# EAGLE board HM11 Breakout-Panel (EAGLE 9.6.2)
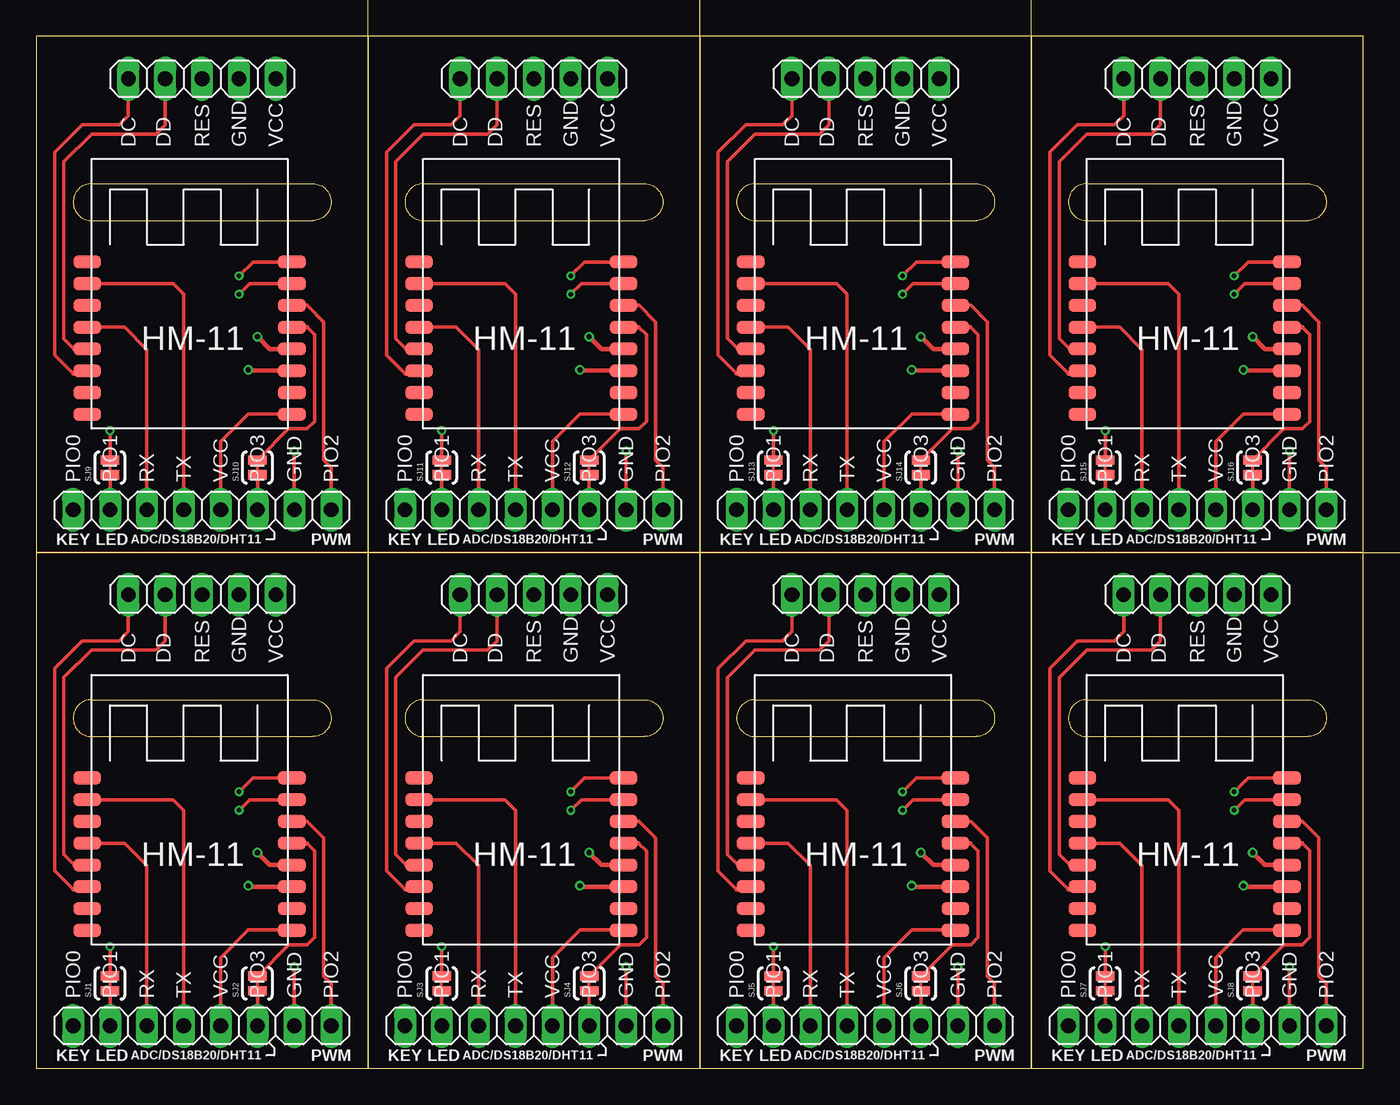
[diagram p0: board, top side]
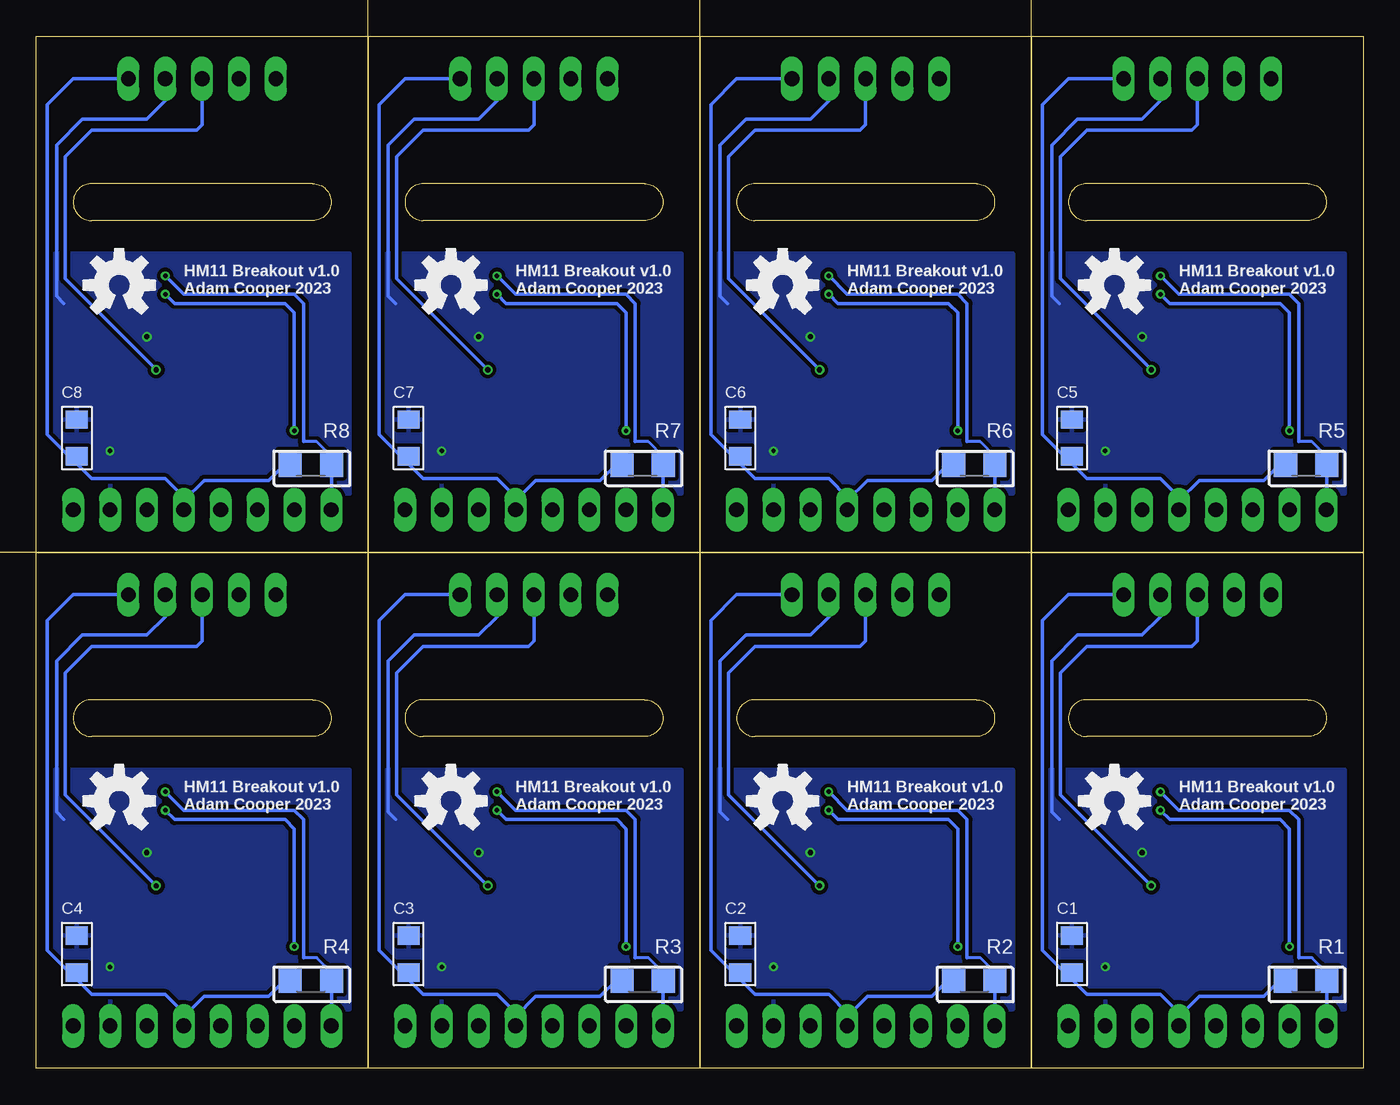
[diagram p1: board, bottom side, seen from below]

Size 91.44 x 71.12 mm. Coordinates in mm from the lower left corner, seen from the top.
Outline: 22.86,0 0,0 0,35.56
Outline: 22.86,0 22.86,35.56
Outline: 22.86,35.56 0,35.56
Outline: 22.86,0 45.72,0
Outline: 45.72,0 45.72,35.56
Outline: 45.72,35.56 22.86,35.56
Outline: 22.86,35.56 22.86,0
Outline: 45.72,0 68.58,0
Outline: 68.58,0 68.58,35.56
Outline: 68.58,35.56 45.72,35.56
Outline: 45.72,35.56 45.72,0
Outline: 68.58,0 91.44,0 91.44,35.56
Outline: 91.44,35.56 68.58,35.56
Outline: 68.58,35.56 68.58,0
Outline: 0,35.56 22.86,35.56
Outline: 22.86,35.56 22.86,71.12
Outline: 22.86,71.12 0,71.12 0,35.56
Outline: 22.86,35.56 45.72,35.56
Outline: 45.72,35.56 45.72,71.12
Outline: 45.72,71.12 22.86,71.12
Outline: 22.86,71.12 22.86,35.56
Outline: 45.72,35.56 68.58,35.56
Outline: 68.58,35.56 68.58,71.12
Outline: 68.58,71.12 45.72,71.12
Outline: 45.72,71.12 45.72,35.56
Outline: 68.58,35.56 91.44,35.56
Outline: 91.44,35.56 91.44,71.12 68.58,71.12
Outline: 68.58,71.12 68.58,35.56
Copper layers (1*16): Top 0.035mm / dielectric 1.5mm / Bottom 0.035mm
Design rules "Seeed Fusion_eagle_rule_v1.1": minimum track width 6mil, minimum drill 12mil, track to track 6mil, track to pad 6mil, pad to pad 6mil, via to via 6mil, smd to smd 0mil, copper to edge 10mil, drill to drill 10mil, minimum pad ring 10mil, minimum via ring 6mil, stop-mask expansion 2mil, vias tented up to drill 100mil, thermal gap 10mil
Milling: 36 lines

## Footprints (pad centres in the part's own frame; a part is rotated, then mirrored left to right if it is on the bottom)
1206 = smd 1.27 x 1.524: 1 -1.27,0; 2 1.27,0
1X05 = drill 1.016 long: 1 -5.08,0; 2 -2.54,0; 3 0,0; 4 2.54,0; 5 5.08,0
1X08 = drill 1.016 long: 1 -8.89,0; 2 -6.35,0; 3 -3.81,0; 4 -1.27,0; 5 1.27,0; 6 3.81,0; 7 6.35,0; 8 8.89,0
R1206 = smd 1.6 x 1.803: 1 -1.422,0; 2 1.422,0
SJ_2S-TRACE = smd 0.635 x 1.27: 1 -0.508,0; 2 0.508,0
HM-11 = smd 1.9 x 0.9: 1 -0.3,11.5; 2 -0.3,10; 3 -0.3,8.5; 4 -0.3,7; 5 -0.3,5.5; 6 -0.3,4; 7 -0.3,2.5; 8 -0.3,1; 9 13.8,1; 10 13.8,2.5; 11 13.8,4; 12 13.8,5.5; 13 13.8,7; 14 13.8,8.5; 15 13.8,10; 16 13.8,11.5

## Placement (x,y rotation side)
C1  100n  [1206]  20.07,7.87 270 bottom
C2  100n  [1206]  42.93,7.87 270 bottom
C3  100n  [1206]  65.79,7.87 270 bottom
C4  100n  [1206]  88.65,7.87 270 bottom
C5  100n  [1206]  20.07,43.43 270 bottom
C6  100n  [1206]  42.93,43.43 270 bottom
C7  100n  [1206]  65.79,43.43 270 bottom
C8  100n  [1206]  88.65,43.43 270 bottom
JP1  [1X05]  11.43,32.64 0 top
JP2  [1X08]  11.43,2.92 180 top
JP3  [1X05]  34.29,32.64 0 top
JP4  [1X08]  34.29,2.92 180 top
JP5  [1X05]  57.15,32.64 0 top
JP6  [1X08]  57.15,2.92 180 top
JP7  [1X05]  80.01,32.64 0 top
JP8  [1X08]  80.01,2.92 180 top
JP9  [1X05]  11.43,68.2 0 top
JP10  [1X08]  11.43,38.48 180 top
JP11  [1X05]  34.29,68.2 0 top
JP12  [1X08]  34.29,38.48 180 top
JP13  [1X05]  57.15,68.2 0 top
JP14  [1X08]  57.15,38.48 180 top
JP15  [1X05]  80.01,68.2 0 top
JP16  [1X08]  80.01,38.48 180 top
LOGO1  OSHW-LOGOM  [OSHW-LOGO-M]  17.14,18.41 0 bottom
LOGO2  OSHW-LOGOM  [OSHW-LOGO-M]  40.01,18.41 0 bottom
LOGO3  OSHW-LOGOM  [OSHW-LOGO-M]  62.87,18.41 0 bottom
LOGO4  OSHW-LOGOM  [OSHW-LOGO-M]  85.72,18.41 0 bottom
LOGO5  OSHW-LOGOM  [OSHW-LOGO-M]  17.14,53.98 0 bottom
LOGO6  OSHW-LOGOM  [OSHW-LOGO-M]  40.01,53.98 0 bottom
LOGO7  OSHW-LOGOM  [OSHW-LOGO-M]  62.87,53.98 0 bottom
LOGO8  OSHW-LOGOM  [OSHW-LOGO-M]  85.72,53.98 0 bottom
R1  1k  [R1206]  3.94,6.1 180 bottom
R2  1k  [R1206]  26.8,6.1 180 bottom
R3  1k  [R1206]  49.66,6.1 180 bottom
R4  1k  [R1206]  72.52,6.1 180 bottom
R5  1k  [R1206]  3.94,41.66 180 bottom
R6  1k  [R1206]  26.8,41.66 180 bottom
R7  1k  [R1206]  49.66,41.66 180 bottom
R8  1k  [R1206]  72.52,41.66 180 bottom
SJ1  SOLDERJUMPERTRACE  [SJ_2S-TRACE]  5.08,5.84 90 top
SJ2  SOLDERJUMPERTRACE  [SJ_2S-TRACE]  15.24,5.84 90 top
SJ3  SOLDERJUMPERTRACE  [SJ_2S-TRACE]  27.94,5.84 90 top
SJ4  SOLDERJUMPERTRACE  [SJ_2S-TRACE]  38.1,5.84 90 top
SJ5  SOLDERJUMPERTRACE  [SJ_2S-TRACE]  50.8,5.84 90 top
SJ6  SOLDERJUMPERTRACE  [SJ_2S-TRACE]  60.96,5.84 90 top
SJ7  SOLDERJUMPERTRACE  [SJ_2S-TRACE]  73.66,5.84 90 top
SJ8  SOLDERJUMPERTRACE  [SJ_2S-TRACE]  83.82,5.84 90 top
SJ9  SOLDERJUMPERTRACE  [SJ_2S-TRACE]  5.08,41.4 90 top
SJ10  SOLDERJUMPERTRACE  [SJ_2S-TRACE]  15.24,41.4 90 top
SJ11  SOLDERJUMPERTRACE  [SJ_2S-TRACE]  27.94,41.4 90 top
SJ12  SOLDERJUMPERTRACE  [SJ_2S-TRACE]  38.1,41.4 90 top
SJ13  SOLDERJUMPERTRACE  [SJ_2S-TRACE]  50.8,41.4 90 top
SJ14  SOLDERJUMPERTRACE  [SJ_2S-TRACE]  60.96,41.4 90 top
SJ15  SOLDERJUMPERTRACE  [SJ_2S-TRACE]  73.66,41.4 90 top
SJ16  SOLDERJUMPERTRACE  [SJ_2S-TRACE]  83.82,41.4 90 top
U$1  HM-11  [HM-11]  3.81,8.51 0 top
U$2  HM-11  [HM-11]  26.67,8.51 0 top
U$3  HM-11  [HM-11]  49.53,8.51 0 top
U$4  HM-11  [HM-11]  72.39,8.51 0 top
U$5  HM-11  [HM-11]  3.81,44.07 0 top
U$6  HM-11  [HM-11]  26.67,44.07 0 top
U$7  HM-11  [HM-11]  49.53,44.07 0 top
U$8  HM-11  [HM-11]  72.39,44.07 0 top

## Library data of the parts
C1-C8 LOGO1-LOGO8 SJ1-SJ16 = Master 2016
JP1-JP16 = pinhead
R1-R8 = rcl; SPICEPREFIX: R
U$1-U$8 = SMD Stamp Modules

## Nets
DC: JP1.1 U$1.6
DC1: JP3.1 U$2.6
DC2: JP5.1 U$3.6
DC3: JP7.1 U$4.6
DC4: JP9.1 U$5.6
DC5: JP11.1 U$6.6
DC6: JP13.1 U$7.6
DC7: JP15.1 U$8.6
DD: JP1.2 U$1.5
DD1: JP3.2 U$2.5
DD2: JP5.2 U$3.5
DD3: JP7.2 U$4.5
DD4: JP9.2 U$5.5
DD5: JP11.2 U$6.5
DD6: JP13.2 U$7.5
DD7: JP15.2 U$8.5
GND: C1.1 JP1.4 JP2.2 U$1.12
GND1: C2.1 JP3.4 JP4.2 U$2.12
GND2: C3.1 JP5.4 JP6.2 U$3.12
GND3: C4.1 JP7.4 JP8.2 U$4.12
GND4: C5.1 JP9.4 JP10.2 U$5.12
GND5: C6.1 JP11.4 JP12.2 U$6.12
GND6: C7.1 JP13.4 JP14.2 U$7.12
GND7: C8.1 JP15.4 JP16.2 U$8.12
N$1: JP2.7 SJ1.1
N$2: JP4.7 SJ3.1
N$3: JP4.3 SJ4.1
N$4: JP6.7 SJ5.1
N$5: JP6.3 SJ6.1
N$6: JP2.3 SJ2.1
N$7: JP8.7 SJ7.1
N$8: JP8.3 SJ8.1
N$9: JP10.7 SJ9.1
N$10: JP10.3 SJ10.1
N$11: JP12.7 SJ11.1
N$12: JP12.3 SJ12.1
N$13: JP14.7 SJ13.1
N$14: JP14.3 SJ14.1
N$15: JP16.7 SJ15.1
N$16: JP16.3 SJ16.1
P0_1: JP4.8 R2.1 U$2.16
P0_2: SJ3.2 U$2.15
P0_3: JP6.8 R3.1 U$3.16
P0_4: SJ5.2 U$3.15
P0_5: JP8.8 R4.1 U$4.16
P0_6: JP2.8 R1.1 U$1.16
P0_7: SJ1.2 U$1.15
P0_8: SJ7.2 U$4.15
P0_9: JP10.8 R5.1 U$5.16
P0_10: SJ9.2 U$5.15
P0_11: JP12.8 R6.1 U$6.16
P0_12: SJ11.2 U$6.15
P0_13: JP14.8 R7.1 U$7.16
P0_14: SJ13.2 U$7.15
P0_15: JP16.8 R8.1 U$8.16
P0_16: SJ15.2 U$8.15
P1_0: JP2.1 U$1.14
P1_1: SJ2.2 U$1.13
P1_2: JP4.1 U$2.14
P1_3: SJ4.2 U$2.13
P1_4: JP6.1 U$3.14
P1_5: SJ6.2 U$3.13
P1_6: JP8.1 U$4.14
P1_7: SJ8.2 U$4.13
P1_8: JP10.1 U$5.14
P1_9: SJ10.2 U$5.13
P1_10: JP12.1 U$6.14
P1_11: SJ12.2 U$6.13
P1_12: JP14.1 U$7.14
P1_13: SJ14.2 U$7.13
P1_14: JP16.1 U$8.14
P1_15: SJ16.2 U$8.13
RST: JP1.3 U$1.11
RST1: JP3.3 U$2.11
RST2: JP5.3 U$3.11
RST3: JP7.3 U$4.11
RST4: JP9.3 U$5.11
RST5: JP11.3 U$6.11
RST6: JP13.3 U$7.11
RST7: JP15.3 U$8.11
RX: JP2.6 U$1.4
RX1: JP4.6 U$2.4
RX2: JP6.6 U$3.4
RX3: JP8.6 U$4.4
RX4: JP10.6 U$5.4
RX5: JP12.6 U$6.4
RX6: JP14.6 U$7.4
RX7: JP16.6 U$8.4
TX: JP2.5 U$1.2
TX1: JP4.5 U$2.2
TX2: JP6.5 U$3.2
TX3: JP8.5 U$4.2
TX4: JP10.5 U$5.2
TX5: JP12.5 U$6.2
TX6: JP14.5 U$7.2
TX7: JP16.5 U$8.2
VCC: C1.2 JP1.5 JP2.4 R1.2 U$1.9
VCC1: C2.2 JP3.5 JP4.4 R2.2 U$2.9
VCC2: C3.2 JP5.5 JP6.4 R3.2 U$3.9
VCC3: C4.2 JP7.5 JP8.4 R4.2 U$4.9
VCC4: C5.2 JP9.5 JP10.4 R5.2 U$5.9
VCC5: C6.2 JP11.5 JP12.4 R6.2 U$6.9
VCC6: C7.2 JP13.5 JP14.4 R7.2 U$7.9
VCC7: C8.2 JP15.5 JP16.4 R8.2 U$8.9

## Tracks (layer width: path | path; a pad name or v marks a point on that pad's centre or on a via)
DC
  Top 0.254: JP1.1 6.35,30.1 5.71,29.46 3.17,29.46 1.27,27.56 1.27,13.59 2.54,12.32
  Top 0.305: 2.54,12.32 3.32,12.32 U$1.6
DC1
  Top 0.254: JP3.1 29.21,30.1 28.57,29.46 26.04,29.46 24.13,27.56 24.13,13.59 25.4,12.32
  Top 0.305: 25.4,12.32 26.18,12.32 U$2.6
DC2
  Top 0.254: JP5.1 52.07,30.1 51.44,29.46 48.9,29.46 46.99,27.56 46.99,13.59 48.26,12.32
  Top 0.305: 48.26,12.32 49.04,12.32 U$3.6
DC3
  Top 0.254: JP7.1 74.93,30.1 74.3,29.46 71.75,29.46 69.85,27.56 69.85,13.59 71.12,12.32
  Top 0.305: 71.12,12.32 71.9,12.32 U$4.6
DC4
  Top 0.254: JP9.1 6.35,65.66 5.71,65.02 3.17,65.02 1.27,63.12 1.27,49.15 2.54,47.88
  Top 0.305: 2.54,47.88 3.32,47.88 U$5.6
DC5
  Top 0.254: JP11.1 29.21,65.66 28.57,65.02 26.04,65.02 24.13,63.12 24.13,49.15 25.4,47.88
  Top 0.305: 25.4,47.88 26.18,47.88 U$6.6
DC6
  Top 0.254: JP13.1 52.07,65.66 51.44,65.02 48.9,65.02 46.99,63.12 46.99,49.15 48.26,47.88
  Top 0.305: 48.26,47.88 49.04,47.88 U$7.6
DC7
  Top 0.254: JP15.1 74.93,65.66 74.3,65.02 71.75,65.02 69.85,63.12 69.85,49.15 71.12,47.88
  Top 0.305: 71.12,47.88 71.9,47.88 U$8.6
DD
  Top 0.254: 2.63,14.01 1.91,14.73 1.91,26.92 3.81,28.83 8.26,28.83 8.89,29.46 JP1.2
  Top 0.305: U$1.5 2.63,14.01
DD1
  Top 0.254: 25.49,14.01 24.77,14.73 24.77,26.92 26.67,28.83 31.11,28.83 31.75,29.46 JP3.2
  Top 0.305: U$2.5 25.49,14.01
DD2
  Top 0.254: 48.35,14.01 47.62,14.73 47.62,26.92 49.53,28.83 53.98,28.83 54.61,29.46 JP5.2
  Top 0.305: U$3.5 48.35,14.01
DD3
  Top 0.254: 71.21,14.01 70.48,14.73 70.48,26.92 72.39,28.83 76.83,28.83 77.47,29.46 JP7.2
  Top 0.305: U$4.5 71.21,14.01
DD4
  Top 0.254: 2.63,49.57 1.91,50.29 1.91,62.48 3.81,64.39 8.26,64.39 8.89,65.02 JP9.2
  Top 0.305: U$5.5 2.63,49.57
DD5
  Top 0.254: 25.49,49.57 24.77,50.29 24.77,62.48 26.67,64.39 31.11,64.39 31.75,65.02 JP11.2
  Top 0.305: U$6.5 25.49,49.57
DD6
  Top 0.254: 48.35,49.57 47.62,50.29 47.62,62.48 49.53,64.39 53.98,64.39 54.61,65.02 JP13.2
  Top 0.305: U$7.5 48.35,49.57
DD7
  Top 0.254: 71.21,49.57 70.48,50.29 70.48,62.48 72.39,64.39 76.83,64.39 77.47,65.02 JP15.2
  Top 0.305: U$8.5 71.21,49.57
GND  (via drill 0.3 pad 0.61, 0.35 pad 0.61)
  Top 0.254: JP2.2 v17.78,6.99
  Top 0.305: U$1.12 16.09,14.01 v15.24,14.86
  Bottom 0.254: JP1.4 13.97,31.11 15.24,29.84 19.68,29.84 21.46,28.07 21.46,17.65 20.95,17.14
  pour Bottom (isolate 0.254): 1.27,4.06 1.27,20.57 21.59,20.57 21.59,4.06
GND1  (via drill 0.3 pad 0.61, 0.35 pad 0.61)
  Top 0.254: JP4.2 v40.64,6.99
  Top 0.305: U$2.12 38.95,14.01 v38.1,14.86
  Bottom 0.254: JP3.4 36.83,31.11 38.1,29.84 42.55,29.84 44.32,28.07 44.32,17.65 43.81,17.14
  pour Bottom (isolate 0.254): 24.13,4.06 24.13,20.57 44.45,20.57 44.45,4.06
GND2  (via drill 0.3 pad 0.61, 0.35 pad 0.61)
  Top 0.254: JP6.2 v63.5,6.99
  Top 0.305: U$3.12 61.81,14.01 v60.96,14.86
  Bottom 0.254: JP5.4 59.69,31.11 60.96,29.84 65.41,29.84 67.18,28.07 67.18,17.65 66.67,17.14
  pour Bottom (isolate 0.254): 46.99,4.06 46.99,20.57 67.31,20.57 67.31,4.06
GND3  (via drill 0.3 pad 0.61, 0.35 pad 0.61)
  Top 0.254: JP8.2 v86.36,6.99
  Top 0.305: U$4.12 84.67,14.01 v83.82,14.86
  Bottom 0.254: JP7.4 82.55,31.11 83.82,29.84 88.27,29.84 90.04,28.07 90.04,17.65 89.53,17.14
  pour Bottom (isolate 0.254): 69.85,4.06 69.85,20.57 90.17,20.57 90.17,4.06
GND4  (via drill 0.3 pad 0.61, 0.35 pad 0.61)
  Top 0.254: JP10.2 v17.78,42.55
  Top 0.305: U$5.12 16.09,49.57 v15.24,50.42
  Bottom 0.254: JP9.4 13.97,66.67 15.24,65.41 19.68,65.41 21.46,63.63 21.46,53.21 20.95,52.7
  pour Bottom (isolate 0.254): 1.27,39.62 1.27,56.13 21.59,56.13 21.59,39.62
GND5  (via drill 0.3 pad 0.61, 0.35 pad 0.61)
  Top 0.254: JP12.2 v40.64,42.55
  Top 0.305: U$6.12 38.95,49.57 v38.1,50.42
  Bottom 0.254: JP11.4 36.83,66.67 38.1,65.41 42.55,65.41 44.32,63.63 44.32,53.21 43.81,52.7
  pour Bottom (isolate 0.254): 24.13,39.62 24.13,56.13 44.45,56.13 44.45,39.62
GND6  (via drill 0.3 pad 0.61, 0.35 pad 0.61)
  Top 0.254: JP14.2 v63.5,42.55
  Top 0.305: U$7.12 61.81,49.57 v60.96,50.42
  Bottom 0.254: JP13.4 59.69,66.67 60.96,65.41 65.41,65.41 67.18,63.63 67.18,53.21 66.67,52.7
  pour Bottom (isolate 0.254): 46.99,39.62 46.99,56.13 67.31,56.13 67.31,39.62
GND7  (via drill 0.3 pad 0.61, 0.35 pad 0.61)
  Top 0.254: JP16.2 v86.36,42.55
  Top 0.305: U$8.12 84.67,49.57 v83.82,50.42
  Bottom 0.254: JP15.4 82.55,66.67 83.82,65.41 88.27,65.41 90.04,63.63 90.04,53.21 89.53,52.7
  pour Bottom (isolate 0.254): 69.85,39.62 69.85,56.13 90.17,56.13 90.17,39.62
N$1
  Top 0.254: SJ1.1 JP2.7
N$2
  Top 0.254: SJ3.1 JP4.7
N$3
  Top 0.254: SJ4.1 JP4.3
N$4
  Top 0.254: SJ5.1 JP6.7
N$5
  Top 0.254: SJ6.1 JP6.3
N$6
  Top 0.254: SJ2.1 JP2.3
N$7
  Top 0.254: SJ7.1 JP8.7
N$8
  Top 0.254: SJ8.1 JP8.3
N$9
  Top 0.254: SJ9.1 JP10.7
N$10
  Top 0.254: SJ10.1 JP10.3
N$11
  Top 0.254: SJ11.1 JP12.7
N$12
  Top 0.254: SJ12.1 JP12.3
N$13
  Top 0.254: SJ13.1 JP14.7
N$14
  Top 0.254: SJ14.1 JP14.3
N$15
  Top 0.254: SJ15.1 JP16.7
N$16
  Top 0.254: SJ16.1 JP16.3
P0_1  (via drill 0.3 pad 0.61)
  Top 0.254: U$2.16 37.79,20.01 v36.83,19.05
  Bottom 0.203: JP4.8 25.38,2.95 | R2.1 25.38,6.6 26.39,7.62 27.3,7.62
  Bottom 0.254: v36.83,19.05 35.56,17.78 27.94,17.78 27.3,17.14 27.3,7.62 | 25.38,2.95 R2.1
P0_2  (via drill 0.3 pad 0.61)
  Top 0.254: SJ3.2 v27.94,8.38 | v36.83,17.78 37.56,18.51 U$2.15
  Bottom 0.254: v27.94,8.38 27.94,16.51 28.57,17.14 36.2,17.14 v36.83,17.78
P0_3  (via drill 0.3 pad 0.61)
  Top 0.254: U$3.16 60.65,20.01 v59.69,19.05
  Bottom 0.203: JP6.8 48.23,2.95 | R3.1 48.23,6.6 49.25,7.62 50.16,7.62
  Bottom 0.254: v59.69,19.05 58.42,17.78 50.8,17.78 50.16,17.14 50.16,7.62 | 48.23,2.95 R3.1
P0_4  (via drill 0.3 pad 0.61)
  Top 0.254: SJ5.2 v50.8,8.38 | v59.69,17.78 60.42,18.51 U$3.15
  Bottom 0.254: v50.8,8.38 50.8,16.51 51.44,17.14 59.05,17.14 v59.69,17.78
P0_5  (via drill 0.3 pad 0.61)
  Top 0.254: U$4.16 83.51,20.01 v82.55,19.05
  Bottom 0.203: JP8.8 71.09,2.95 | R4.1 71.09,6.6 72.11,7.62 73.03,7.62
  Bottom 0.254: v82.55,19.05 81.28,17.78 73.66,17.78 73.03,17.14 73.03,7.62 | 71.09,2.95 R4.1
P0_6  (via drill 0.3 pad 0.61)
  Top 0.254: U$1.16 14.93,20.01 v13.97,19.05
  Bottom 0.203: JP2.8 2.52,2.95 | R1.1 2.52,6.6 3.53,7.62 4.45,7.62
  Bottom 0.254: v13.97,19.05 12.7,17.78 5.08,17.78 4.45,17.14 4.45,7.62 | 2.52,2.95 R1.1
P0_7  (via drill 0.3 pad 0.61)
  Top 0.254: SJ1.2 v5.08,8.38 | v13.97,17.78 14.7,18.51 U$1.15
  Bottom 0.254: v5.08,8.38 5.08,16.51 5.71,17.14 13.34,17.14 v13.97,17.78
P0_8  (via drill 0.3 pad 0.61)
  Top 0.254: SJ7.2 v73.66,8.38 | v82.55,17.78 83.28,18.51 U$4.15
  Bottom 0.254: v73.66,8.38 73.66,16.51 74.3,17.14 81.92,17.14 v82.55,17.78
P0_9  (via drill 0.3 pad 0.61)
  Top 0.254: U$5.16 14.93,55.57 v13.97,54.61
  Bottom 0.203: JP10.8 2.52,38.51 | R5.1 2.52,42.16 3.53,43.18 4.45,43.18
  Bottom 0.254: v13.97,54.61 12.7,53.34 5.08,53.34 4.45,52.7 4.45,43.18 | 2.52,38.51 R5.1
P0_10  (via drill 0.3 pad 0.61)
  Top 0.254: SJ9.2 v5.08,43.94 | v13.97,53.34 14.7,54.07 U$5.15
  Bottom 0.254: v5.08,43.94 5.08,52.07 5.71,52.7 13.34,52.7 v13.97,53.34
P0_11  (via drill 0.3 pad 0.61)
  Top 0.254: U$6.16 37.79,55.57 v36.83,54.61
  Bottom 0.203: JP12.8 25.38,38.51 | R6.1 25.38,42.16 26.39,43.18 27.3,43.18
  Bottom 0.254: v36.83,54.61 35.56,53.34 27.94,53.34 27.3,52.7 27.3,43.18 | 25.38,38.51 R6.1
P0_12  (via drill 0.3 pad 0.61)
  Top 0.254: SJ11.2 v27.94,43.94 | v36.83,53.34 37.56,54.07 U$6.15
  Bottom 0.254: v27.94,43.94 27.94,52.07 28.57,52.7 36.2,52.7 v36.83,53.34
P0_13  (via drill 0.3 pad 0.61)
  Top 0.254: U$7.16 60.65,55.57 v59.69,54.61
  Bottom 0.203: JP14.8 48.23,38.51 | R7.1 48.23,42.16 49.25,43.18 50.16,43.18
  Bottom 0.254: v59.69,54.61 58.42,53.34 50.8,53.34 50.16,52.7 50.16,43.18 | 48.23,38.51 R7.1
P0_14  (via drill 0.3 pad 0.61)
  Top 0.254: SJ13.2 v50.8,43.94 | v59.69,53.34 60.42,54.07 U$7.15
  Bottom 0.254: v50.8,43.94 50.8,52.07 51.44,52.7 59.05,52.7 v59.69,53.34
P0_15  (via drill 0.3 pad 0.61)
  Top 0.254: U$8.16 83.51,55.57 v82.55,54.61
  Bottom 0.203: JP16.8 71.09,38.51 | R8.1 71.09,42.16 72.11,43.18 73.03,43.18
  Bottom 0.254: v82.55,54.61 81.28,53.34 73.66,53.34 73.03,52.7 73.03,43.18 | 71.09,38.51 R8.1
P0_16  (via drill 0.3 pad 0.61)
  Top 0.254: SJ15.2 v73.66,43.94 | v82.55,53.34 83.28,54.07 U$8.15
  Bottom 0.254: v73.66,43.94 73.66,52.07 74.3,52.7 81.92,52.7 v82.55,53.34
P1_0
  Top 0.254: U$1.14 18.67,17.02 19.81,15.88 19.81,6.35 20.32,5.84 JP2.1
  Top 0.305: U$1.14
P1_1
  Top 0.254: 18.65,15.51 19.18,14.99 19.18,9.02 18.67,8.51 17.4,8.51 SJ2.2
  Top 0.305: 18.65,15.51 U$1.13
P1_2
  Top 0.254: U$2.14 41.53,17.02 42.67,15.88 42.67,6.35 43.18,5.84 JP4.1
  Top 0.305: U$2.14
P1_3
  Top 0.254: 41.51,15.51 42.04,14.99 42.04,9.02 41.53,8.51 40.26,8.51 SJ4.2
  Top 0.305: 41.51,15.51 U$2.13
P1_4
  Top 0.254: U$3.14 64.39,17.02 65.53,15.88 65.53,6.35 66.04,5.84 JP6.1
  Top 0.305: U$3.14
P1_5
  Top 0.254: 64.37,15.51 64.9,14.99 64.9,9.02 64.39,8.51 63.12,8.51 SJ6.2
  Top 0.305: 64.37,15.51 U$3.13
P1_6
  Top 0.254: U$4.14 87.25,17.02 88.39,15.88 88.39,6.35 88.9,5.84 JP8.1
  Top 0.305: U$4.14
P1_7
  Top 0.254: 87.23,15.51 87.76,14.99 87.76,9.02 87.25,8.51 85.98,8.51 SJ8.2
  Top 0.305: 87.23,15.51 U$4.13
P1_8
  Top 0.254: U$5.14 18.67,52.58 19.81,51.44 19.81,41.91 20.32,41.4 JP10.1
  Top 0.305: U$5.14
P1_9
  Top 0.254: 18.65,51.07 19.18,50.55 19.18,44.58 18.67,44.07 17.4,44.07 SJ10.2
  Top 0.305: 18.65,51.07 U$5.13
P1_10
  Top 0.254: U$6.14 41.53,52.58 42.67,51.44 42.67,41.91 43.18,41.4 JP12.1
  Top 0.305: U$6.14
P1_11
  Top 0.254: 41.51,51.07 42.04,50.55 42.04,44.58 41.53,44.07 40.26,44.07 SJ12.2
  Top 0.305: 41.51,51.07 U$6.13
P1_12
  Top 0.254: U$7.14 64.39,52.58 65.53,51.44 65.53,41.91 66.04,41.4 JP14.1
  Top 0.305: U$7.14
P1_13
  Top 0.254: 64.37,51.07 64.9,50.55 64.9,44.58 64.39,44.07 63.12,44.07 SJ14.2
  Top 0.305: 64.37,51.07 U$7.13
P1_14
  Top 0.254: U$8.14 87.25,52.58 88.39,51.44 88.39,41.91 88.9,41.4 JP16.1
  Top 0.305: U$8.14
P1_15
  Top 0.254: 87.23,51.07 87.76,50.55 87.76,44.58 87.25,44.07 85.98,44.07 SJ16.2
  Top 0.305: 87.23,51.07 U$8.13
RST  (via drill 0.35 pad 0.61)
  Top 0.305: U$1.11 14.67,12.51 v14.61,12.57
  Bottom 0.254: JP1.3 11.43,29.46 11.81,29.08 19.05,29.08 20.88,27.26 20.88,18.84 v14.61,12.57
RST1  (via drill 0.35 pad 0.61)
  Top 0.305: U$2.11 37.53,12.51 v37.47,12.57
  Bottom 0.254: JP3.3 34.29,29.46 34.67,29.08 41.91,29.08 43.73,27.26 43.73,18.84 v37.47,12.57
RST2  (via drill 0.35 pad 0.61)
  Top 0.305: U$3.11 60.39,12.51 v60.33,12.57
  Bottom 0.254: JP5.3 57.15,29.46 57.53,29.08 64.77,29.08 66.59,27.26 66.59,18.84 v60.33,12.57
RST3  (via drill 0.35 pad 0.61)
  Top 0.305: U$4.11 83.25,12.51 v83.19,12.57
  Bottom 0.254: JP7.3 80.01,29.46 80.39,29.08 87.63,29.08 89.45,27.26 89.45,18.84 v83.19,12.57
RST4  (via drill 0.35 pad 0.61)
  Top 0.305: U$5.11 14.67,48.07 v14.61,48.13
  Bottom 0.254: JP9.3 11.43,65.02 11.81,64.64 19.05,64.64 20.88,62.82 20.88,54.4 v14.61,48.13
RST5  (via drill 0.35 pad 0.61)
  Top 0.305: U$6.11 37.53,48.07 v37.47,48.13
  Bottom 0.254: JP11.3 34.29,65.02 34.67,64.64 41.91,64.64 43.73,62.82 43.73,54.4 v37.47,48.13
RST6  (via drill 0.35 pad 0.61)
  Top 0.305: U$7.11 60.39,48.07 v60.33,48.13
  Bottom 0.254: JP13.3 57.15,65.02 57.53,64.64 64.77,64.64 66.59,62.82 66.59,54.4 v60.33,48.13
RST7  (via drill 0.35 pad 0.61)
  Top 0.305: U$8.11 83.25,48.07 v83.19,48.13
  Bottom 0.254: JP15.3 80.01,65.02 80.39,64.64 87.63,64.64 89.45,62.82 89.45,54.4 v83.19,48.13
RX
  Top 0.254: JP2.6 7.62,13.97 6.08,15.51 U$1.4
RX1
  Top 0.254: JP4.6 30.48,13.97 28.94,15.51 U$2.4
RX2
  Top 0.254: JP6.6 53.34,13.97 51.8,15.51 U$3.4
RX3
  Top 0.254: JP8.6 76.2,13.97 74.66,15.51 U$4.4
RX4
  Top 0.254: JP10.6 7.62,49.53 6.08,51.07 U$5.4
RX5
  Top 0.254: JP12.6 30.48,49.53 28.94,51.07 U$6.4
RX6
  Top 0.254: JP14.6 53.34,49.53 51.8,51.07 U$7.4
RX7
  Top 0.254: JP16.6 76.2,49.53 74.66,51.07 U$8.4
TX
  Top 0.254: JP2.5 10.16,17.78 9.43,18.51 U$1.2
TX1
  Top 0.254: JP4.5 33.02,17.78 32.29,18.51 U$2.2
TX2
  Top 0.254: JP6.5 55.88,17.78 55.15,18.51 U$3.2
TX3
  Top 0.254: JP8.5 78.74,17.78 78.01,18.51 U$4.2
TX4
  Top 0.254: JP10.5 10.16,53.34 9.43,54.07 U$5.2
TX5
  Top 0.254: JP12.5 33.02,53.34 32.29,54.07 U$6.2
TX6
  Top 0.254: JP14.5 55.88,53.34 55.15,54.07 U$7.2
TX7
  Top 0.254: JP16.5 78.74,53.34 78.01,54.07 U$8.2
VCC
  Top 0.254: 17.59,9.53 14.61,9.53 12.7,7.62 JP2.4
  Top 0.305: 17.59,9.53 U$1.9
  Bottom 0.152: 22.1,8.13 20.57,6.6 20.32,6.6 | 20.32,6.6 C1.2 | 19.05,5.08 20.32,6.35 20.32,6.6
  Bottom 0.254: JP1.5 20.32,32.64 22.1,30.86 22.1,8.13 19.05,5.08 13.97,5.08 12.7,3.81 JP2.4 12.7,3.56 11.3,4.95 6.86,4.95 5.71,6.1 R1.2
VCC1
  Top 0.254: 40.45,9.53 37.47,9.53 35.56,7.62 JP4.4
  Top 0.305: 40.45,9.53 U$2.9
  Bottom 0.152: 44.96,8.13 43.43,6.6 43.18,6.6 | 43.18,6.6 C2.2 | 41.91,5.08 43.18,6.35 43.18,6.6
  Bottom 0.254: JP3.5 43.18,32.64 44.96,30.86 44.96,8.13 41.91,5.08 36.83,5.08 35.56,3.81 JP4.4 35.56,3.56 34.16,4.95 29.72,4.95 28.57,6.1 R2.2
VCC2
  Top 0.254: 63.31,9.53 60.33,9.53 58.42,7.62 JP6.4
  Top 0.305: 63.31,9.53 U$3.9
  Bottom 0.152: 67.82,8.13 66.29,6.6 66.04,6.6 | 66.04,6.6 C3.2 | 64.77,5.08 66.04,6.35 66.04,6.6
  Bottom 0.254: JP5.5 66.04,32.64 67.82,30.86 67.82,8.13 64.77,5.08 59.69,5.08 58.42,3.81 JP6.4 58.42,3.56 57.02,4.95 52.58,4.95 51.44,6.1 R3.2
VCC3
  Top 0.254: 86.17,9.53 83.19,9.53 81.28,7.62 JP8.4
  Top 0.305: 86.17,9.53 U$4.9
  Bottom 0.152: 90.68,8.13 89.15,6.6 88.9,6.6 | 88.9,6.6 C4.2 | 87.63,5.08 88.9,6.35 88.9,6.6
  Bottom 0.254: JP7.5 88.9,32.64 90.68,30.86 90.68,8.13 87.63,5.08 82.55,5.08 81.28,3.81 JP8.4 81.28,3.56 79.88,4.95 75.44,4.95 74.3,6.1 R4.2
VCC4
  Top 0.254: 17.59,45.09 14.61,45.09 12.7,43.18 JP10.4
  Top 0.305: 17.59,45.09 U$5.9
  Bottom 0.152: 22.1,43.69 20.57,42.16 20.32,42.16 | 20.32,42.16 C5.2 | 19.05,40.64 20.32,41.91 20.32,42.16
  Bottom 0.254: JP9.5 20.32,68.2 22.1,66.42 22.1,43.69 19.05,40.64 13.97,40.64 12.7,39.37 JP10.4 12.7,39.12 11.3,40.51 6.86,40.51 5.71,41.66 R5.2
VCC5
  Top 0.254: 40.45,45.09 37.47,45.09 35.56,43.18 JP12.4
  Top 0.305: 40.45,45.09 U$6.9
  Bottom 0.152: 44.96,43.69 43.43,42.16 43.18,42.16 | 43.18,42.16 C6.2 | 41.91,40.64 43.18,41.91 43.18,42.16
  Bottom 0.254: JP11.5 43.18,68.2 44.96,66.42 44.96,43.69 41.91,40.64 36.83,40.64 35.56,39.37 JP12.4 35.56,39.12 34.16,40.51 29.72,40.51 28.57,41.66 R6.2
VCC6
  Top 0.254: 63.31,45.09 60.33,45.09 58.42,43.18 JP14.4
  Top 0.305: 63.31,45.09 U$7.9
  Bottom 0.152: 67.82,43.69 66.29,42.16 66.04,42.16 | 66.04,42.16 C7.2 | 64.77,40.64 66.04,41.91 66.04,42.16
  Bottom 0.254: JP13.5 66.04,68.2 67.82,66.42 67.82,43.69 64.77,40.64 59.69,40.64 58.42,39.37 JP14.4 58.42,39.12 57.02,40.51 52.58,40.51 51.44,41.66 R7.2
VCC7
  Top 0.254: 86.17,45.09 83.19,45.09 81.28,43.18 JP16.4
  Top 0.305: 86.17,45.09 U$8.9
  Bottom 0.152: 90.68,43.69 89.15,42.16 88.9,42.16 | 88.9,42.16 C8.2 | 87.63,40.64 88.9,41.91 88.9,42.16
  Bottom 0.254: JP15.5 88.9,68.2 90.68,66.42 90.68,43.69 87.63,40.64 82.55,40.64 81.28,39.37 JP16.4 81.28,39.12 79.88,40.51 75.44,40.51 74.3,41.66 R8.2

## Text on the board
tPlace: DC | DD | RES | GND | VCC | DC | DD | RES | GND | VCC | DC | DD | RES | GND | VCC | DC | DD | RES | GND | VCC | PIO0 | PIO1 | RX | TX | VCC | PIO3 | GND | PIO2 | PIO0 | PIO1 | RX | TX | VCC | PIO3 | GND | PIO2 | PIO0 | PIO1 | RX | TX | VCC | PIO3 | GND | PIO2 | PIO0 | PIO1 | RX | TX | VCC | PIO3 | GND | PIO2 | KEY | LED | ADC/DS18B20/DHT11 | PWM | KEY | LED | ADC/DS18B20/DHT11 | PWM | KEY | LED | ADC/DS18B20/DHT11 | PWM | KEY | LED | ADC/DS18B20/DHT11 | PWM | DC | DD | RES | GND | VCC | DC | DD | RES | GND | VCC | DC | DD | RES | GND | VCC | DC | DD | RES | GND | VCC | PIO0 | PIO1 | RX | TX | VCC | PIO3 | GND | PIO2 | PIO0 | PIO1 | RX | TX | VCC | PIO3 | GND | PIO2 | PIO0 | PIO1 | RX | TX | VCC | PIO3 | GND | PIO2 | PIO0 | PIO1 | RX | TX | VCC | PIO3 | GND | PIO2 | KEY | LED | ADC/DS18B20/DHT11 | PWM | KEY | LED | ADC/DS18B20/DHT11 | PWM | KEY | LED | ADC/DS18B20/DHT11 | PWM | KEY | LED | ADC/DS18B20/DHT11 | PWM
bNames: HM11 Breakout v1.0 / Adam Cooper 2023 | HM11 Breakout v1.0 / Adam Cooper 2023 | HM11 Breakout v1.0 / Adam Cooper 2023 | HM11 Breakout v1.0 / Adam Cooper 2023 | HM11 Breakout v1.0 / Adam Cooper 2023 | HM11 Breakout v1.0 / Adam Cooper 2023 | HM11 Breakout v1.0 / Adam Cooper 2023 | HM11 Breakout v1.0 / Adam Cooper 2023
Milling: v-score | v-score | v-score | v-score